# EAGLE board Mix (EAGLE 9.7.0)
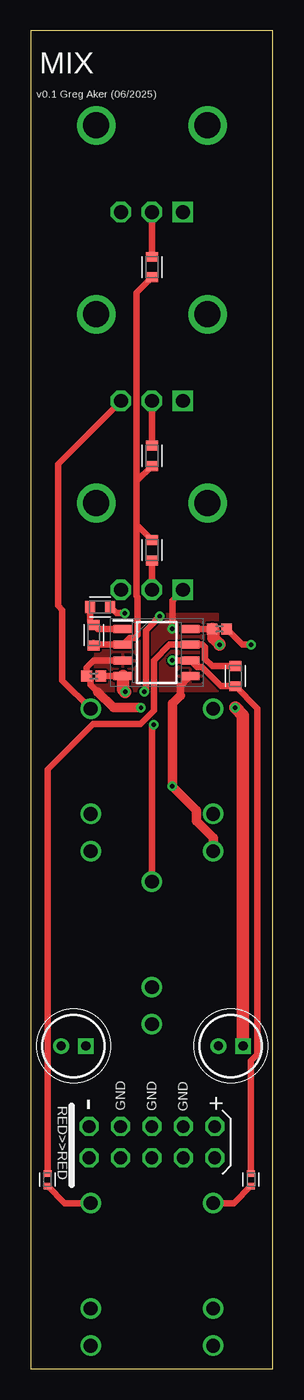
[diagram p0: board, top side]
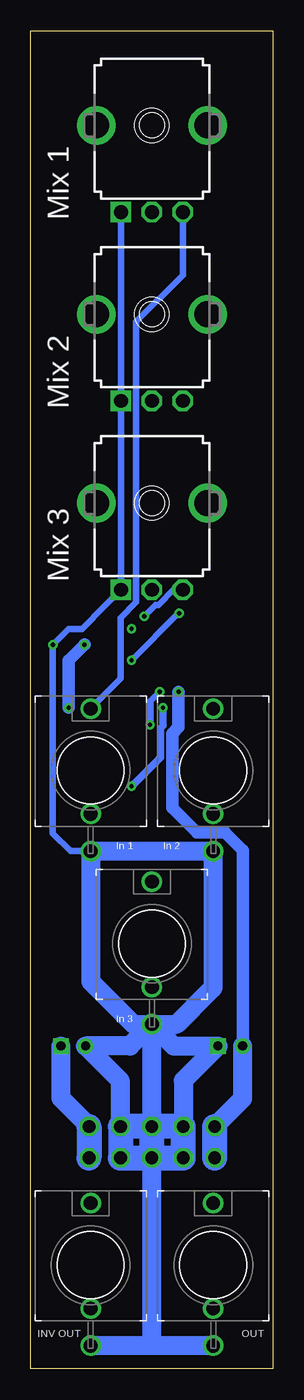
[diagram p1: board, bottom side, seen from below]

Size 19.56 x 107.95 mm. Coordinates in mm from the lower left corner, seen from the top.
Outline: 0,0 19.56,0 19.56,107.95 0,107.95 0,0
Copper layers (1*16): Top 0.035mm / dielectric 1.5mm / Bottom 0.035mm
Design rules "Fusion Electronics Design Rules": minimum track width 6mil, minimum drill 0.35mm, track to track 6mil, track to pad 6mil, pad to pad 6mil, via to via 6mil, smd to smd 6mil, copper to edge 40mil, drill to drill 6mil, minimum pad ring 10mil, minimum via ring 8mil, stop-mask expansion 4mil, vias tented up to drill 9999mil, thermal gap 10mil

## Footprints (pad centres in the part's own frame; a part is rotated, then mirrored left to right if it is on the bottom)
CAPPRD200W55D500H1200 = drill 0.75 pad 1.15 square: 1 0,0 | drill 0.75 pad 1.15: 2 2,0
0402 = smd 0.85 x 0.9: 1 -0.58,0; 2 0.58,0
SOIC127P600X175-8N = smd 1.525 x 0.65: 1 -2.712,1.905; 2 -2.712,0.635; 3 -2.712,-0.635; 4 -2.712,-1.905; 5 2.712,-1.905; 6 2.712,-0.635; 7 2.712,0.635; 8 2.712,1.905
WQP-PJ301M-12_JACK = drill 1.1: P$1_TIP 0,5; P$2_SWITCH 0,-3.5; P$3_SLEEVE 0,-6.5
RESC1608X60 = smd 0.799 x 0.974: 1 -0.815,0; 2 0.815,0
RESC1005X40 = smd 0.535 x 0.644: 1 -0.507,0; 2 0.507,0
EURO_POWER_HEADER = drill 1.016 octagon: 1 -5.08,-1.27; 2 -5.08,1.27; 3 -2.54,-1.27; 4 -2.54,1.27; 5 0,-1.27; 6 0,1.27; 7 2.54,-1.27; 8 2.54,1.27; 9 5.08,-1.27; 10 5.08,1.27
9MM_SNAP-IN_POT = drill 1.1 square: 1 -2.5,-7 | drill 1.1 octagon: 2 0,-7; 3 2.5,-7 | drill 2.1 pad 2.794: CHASSIS1 -4.5,0; CHASSIS2 4.5,0

## Placement (x,y rotation side)
C1  10uf  [CAPPRD200W55D500H1200]  4.45,26.04 180 top
C2  10uf  [CAPPRD200W55D500H1200]  17.14,26.04 180 top
C3  0.1uF  [0402]  5.08,55.88 180 top
C4  0.1uF  [0402]  15.24,59.69 0 top
IC1  TL072BIDT  [SOIC127P600X175-8N]  10.16,57.78 0 top
IN_1  THONKICONNNEW  [WQP-PJ301M-12_JACK]  14.73,48.26 0 bottom
IN_2  THONKICONNNEW  [WQP-PJ301M-12_JACK]  4.83,48.26 0 bottom
IN_3  THONKICONNNEW  [WQP-PJ301M-12_JACK]  9.78,34.29 0 bottom
INV_OUT  THONKICONNNEW  [WQP-PJ301M-12_JACK]  14.73,8.34 0 bottom
OUT  THONKICONNNEW  [WQP-PJ301M-12_JACK]  4.83,8.34 0 bottom
R1  120k  [RESC1608X60]  9.78,88.9 270 top
R2  120k  [RESC1608X60]  9.78,73.66 270 top
R3  120k  [RESC1608X60]  9.78,66.04 90 top
R4  120k  [RESC1608X60]  5.08,59.18 90 top
R5  120k  [RESC1608X60]  5.58,61.46 0 top
R6  120k  [RESC1608X60]  16.51,55.88 90 top
R7  1k  [RESC1005X40]  17.78,15.24 270 top
R8  1k  [RESC1005X40]  1.34,15.24 270 top
SV1  EURO_POWER_HEADERREGULAR  [EURO_POWER_HEADER]  9.78,18.27 0 top
VR1  50k  [9MM_SNAP-IN_POT]  9.78,100.33 0 bottom
VR2  50k  [9MM_SNAP-IN_POT]  9.78,85.09 0 bottom
VR3  50k  [9MM_SNAP-IN_POT]  9.78,69.85 0 bottom

## Library data of the parts
C1 C2 = ECE-A1EN100U; DESCRIPTION: Panasonic 10uF 25 V Aluminium Electrolytic Capacitor, SU Series 1000h 5 x 11mm; HEIGHT: 12mm; MANUFACTURER_NAME: Panasonic; MANUFACTURER_PART_NUMBER: ECE-A1EN100U; MOUSER_PART_NUMBER: 667-ECE-A1EN100U; MOUSER_PRICE-STOCK: https://www.mouser.co.uk/ProductDetail/Panasonic/ECE-A1EN100U?qs=rMMd5vBiahpHy%2F1SRMUp7g%3D%3D
C3 C4 = SparkFun-Capacitors; PROD_ID: CAP-12416
IC1 = TL072BIDT; DESCRIPTION: STMICROELECTRONICS - TL072BIDT - Operational Amplifier, 2 Amplifier, 4 MHz, 16 V/s, 6V to 36V, SOIC, 8 Pins; HEIGHT: 1.75mm; MANUFACTURER_NAME: STMicroelectronics; MANUFACTURER_PART_NUMBER: TL072BIDT; MOUSER_PART_NUMBER: 511-TL072BIDT; MOUSER_PRICE-STOCK: https://www.mouser.co.uk/ProductDetail/STMicroelectronics/TL072BIDT?qs=%252BsFu707QyFwATnhGYo0v%252BA%3D%3D
IN_1-IN_3 INV_OUT OUT SV1 VR1-VR3 = MusicThingModular
R1-R6 = Resistor; CATEGORY: Resistors; DESCRIPTION: Chip Resistor 1.60 X 0.82 X 0.60 mm body 0603(1608-METRIC) Package; PACKAGE_SIZE: 0603; PACKAGE_TYPE: SMD
R7 R8 = Resistor; CATEGORY: Resistors; DESCRIPTION: Chip Resistor 1.05 X 0.54 X 0.40 mm body 0402(1005-METRIC) Package; PACKAGE_SIZE: 0402; PACKAGE_TYPE: SMD

## Nets
+12V: C2.1 C4.1 IC1.8 SV1.9 SV1.10
-12V: C1.2 C3.1 IC1.4 SV1.1 SV1.2
GND: C1.1 C2.2 C3.2 C4.2 IC1.3 IC1.5 IN_1.P$3_SLEEVE IN_2.P$3_SLEEVE IN_3.P$3_SLEEVE INV_OUT.P$3_SLEEVE OUT.P$3_SLEEVE SV1.3 SV1.4 SV1.5 SV1.6 SV1.7 SV1.8 VR1.1 VR2.1 VR3.1
N$1: IN_1.P$1_TIP VR1.3
N$2: IN_2.P$1_TIP VR2.3
N$4: IN_3.P$1_TIP VR3.3
N$5: R1.1 VR1.2
N$6: R2.1 VR2.2
N$7: R3.1 VR3.2
N$8: IC1.1 R4.2 R5.1
N$9: IC1.6 R5.2 R6.1 R7.1
N$10: IC1.2 R1.2 R2.2 R3.2 R4.1
N$11: IC1.7 R6.2 R8.1
N$12: INV_OUT.P$1_TIP R7.2
N$13: OUT.P$1_TIP R8.2

## Tracks (layer width: path | path; a pad name or v marks a point on that pad's centre or on a via)
+12V  (via drill 0.35)
  Top 0.508: IC1.8 C4.1
  Top 1.016: C2.1 17.14,51.44 17.14,52.7 v16.51,53.34 | C4.1 14.73,59.62 14.73,58.97 15.24,58.46 v15.24,58.42
  Bottom 1.016: v16.51,53.34 16.51,57.15 v15.24,58.42
  Bottom 1.524: C2.1 17.14,21.83 SV1.10
  Bottom 2.032: SV1.10 SV1.9
-12V  (via drill 0.35)
  Top 0.508: IC1.4 C3.1
  Top 1.016: v7.62,54.61 7.45,54.78 IC1.4
  Bottom 1.016: C1.2 2.44,41.81 3.9,43.27 6.16,43.27 8.13,45.25 8.13,51.27 7.62,51.78 v7.62,54.61
  Bottom 1.524: SV1.2 2.44,21.8 C1.2
  Bottom 2.032: SV1.1 SV1.2
GND  (via drill 0.35)
  Top 0.508: IC1.3 5.08,57.15 4.5,56.57 C3.2 4.83,55.55 4.83,55.26 4.83,55.18 5.39,54.62 | 12.09,54.61 12.09,54.34 | 12.09,55.1 IC1.5 | C4.2 17.09,58.42 v17.78,58.42 | v11.43,59.69 11.43,62 VR3.1
  Top 0.61: 12.09,54.61 12.09,55.1
  Top 0.762: 12.09,54.34 11.43,53.68 11.43,52.07 v11.43,46.99 13.37,45.05 13.37,44.2 14.73,42.84 IN_1.P$3_SLEEVE | v8.89,53.34 6.75,53.34 6.67,53.34 5.39,54.62
  Bottom 0.508: VR1.1 VR2.1 VR3.1 13.55,61.58 15.44,59.69 16.51,59.69 v17.78,58.42 v17.79,58.41 17.79,43.19 16.36,41.76 IN_1.P$3_SLEEVE
  Bottom 0.61: v8.89,53.34 8.89,51.88 9.1,51.67 9.1,49.32 v11.43,46.99
  Bottom 1.524: SV1.4 7.24,23.24 C1.1 8.02,26.04 IN_3.P$3_SLEEVE | SV1.8 12.32,23.21 C2.2 11.53,26.04 IN_3.P$3_SLEEVE | SV1.6 IN_3.P$3_SLEEVE | OUT.P$3_SLEEVE 10.16,1.84 | 10.16,1.84 INV_OUT.P$3_SLEEVE | 10.16,1.84 9.78,2.22 SV1.5 | IN_3.P$3_SLEEVE 11.28,27.79 13.97,30.48 14.73,31.24 IN_1.P$3_SLEEVE IN_2.P$3_SLEEVE 4.83,30.73 5.08,30.48 7.77,27.79 IN_3.P$3_SLEEVE
  Bottom 2.032: SV1.6 SV1.4 SV1.3 SV1.5 | SV1.6 SV1.8 SV1.7 SV1.5 | SV1.5 SV1.6
  pour Top: 5.16,54.69 15.16,54.69 15.16,60.88 5.16,60.88
N$1
  Bottom 0.508: IN_1.P$1_TIP 12.32,55.67 12.32,60.59 11.05,61.86 11.05,84.48 7.28,88.25 VR1.3
N$2
  Top 0.508: IN_2.P$1_TIP 2.54,55.55 2.54,61.22 2.19,61.58 2.19,73 VR2.3
N$4  (via drill 0.35)
  Top 0.508: v9.15,54.61 9.28,54.73 9.28,59.55 10.07,60.34 10.07,60.4 v10.4,60.72 | v9.94,51.96 9.78,51.8 IN_3.P$1_TIP
  Bottom 0.508: v9.15,54.61 9.89,53.88 9.89,52.01 v9.94,51.96 | v10.4,60.72 9.5,61.62 9.27,61.62 8.04,62.85 VR3.3
N$5
  Top 0.508: VR1.2 R1.1
N$6
  Top 0.508: VR2.2 R2.1
N$7
  Top 0.508: VR3.2 R3.1
N$8
  Top 0.508: IC1.1 5.39,59.69 R4.2 4.77,60.31 R5.1
N$9  (via drill 0.35)
  Top 0.508: R7.1 17.78,17.78 17.78,24.84 18.29,25.34 18.29,41.91 18.29,52.96 18.29,53.29 R6.1 15.35,55.06 14.25,56.16 13.8,56.61 13.41,56.61 IC1.6 v11.43,57.15 | v7.58,60.96 6.9,60.96 R5.2
  Bottom 0.508: v7.58,60.96 7.62,60.96 v11.43,57.15
N$10
  Top 0.508: R1.2 8.54,86.84 8.54,71.12 | 8.54,71.12 8.54,68.58 | 8.54,68.58 8.54,62.35 8.62,62.27 8.62,59.2 8.38,58.96 7.99,58.96 IC1.2 5.21,58.42 5.08,58.55 R4.1 | R2.2 8.54,71.61 8.54,71.12 | R3.2 8.54,68.09 8.54,68.58
N$11
  Top 0.508: R8.1 1.34,48.33 5.04,52.03 8.85,52.03 9.94,53.12 9.94,57.15 11.21,58.42 IC1.7 13.84,58.42 14.04,58.22 14.04,57.27 14.08,57.27 14.65,56.7 R6.2
N$12
  Top 0.508: R7.2 16.39,13.34 INV_OUT.P$1_TIP
N$13
  Top 0.508: OUT.P$1_TIP 2.73,13.34 R8.2

## Text on the board
tPlace: MIX | v0.1 Greg Aker (06/2025)
bPlace: Mix 1 | Mix 2 | Mix 3 | In 2 | In 1 | In 3 | OUT | INV OUT